# Altium PCB indikator.PcbDoc
Units mm, origin at the board's own origin, x right, y up, seen from the top; angles counter-clockwise.
Board outline 30 x 20 mm, 2 copper layers (Top Layer, Bottom Layer), stack 0.98 mm thick; 14 components, 10 nets, 37 pads, 16 vias.
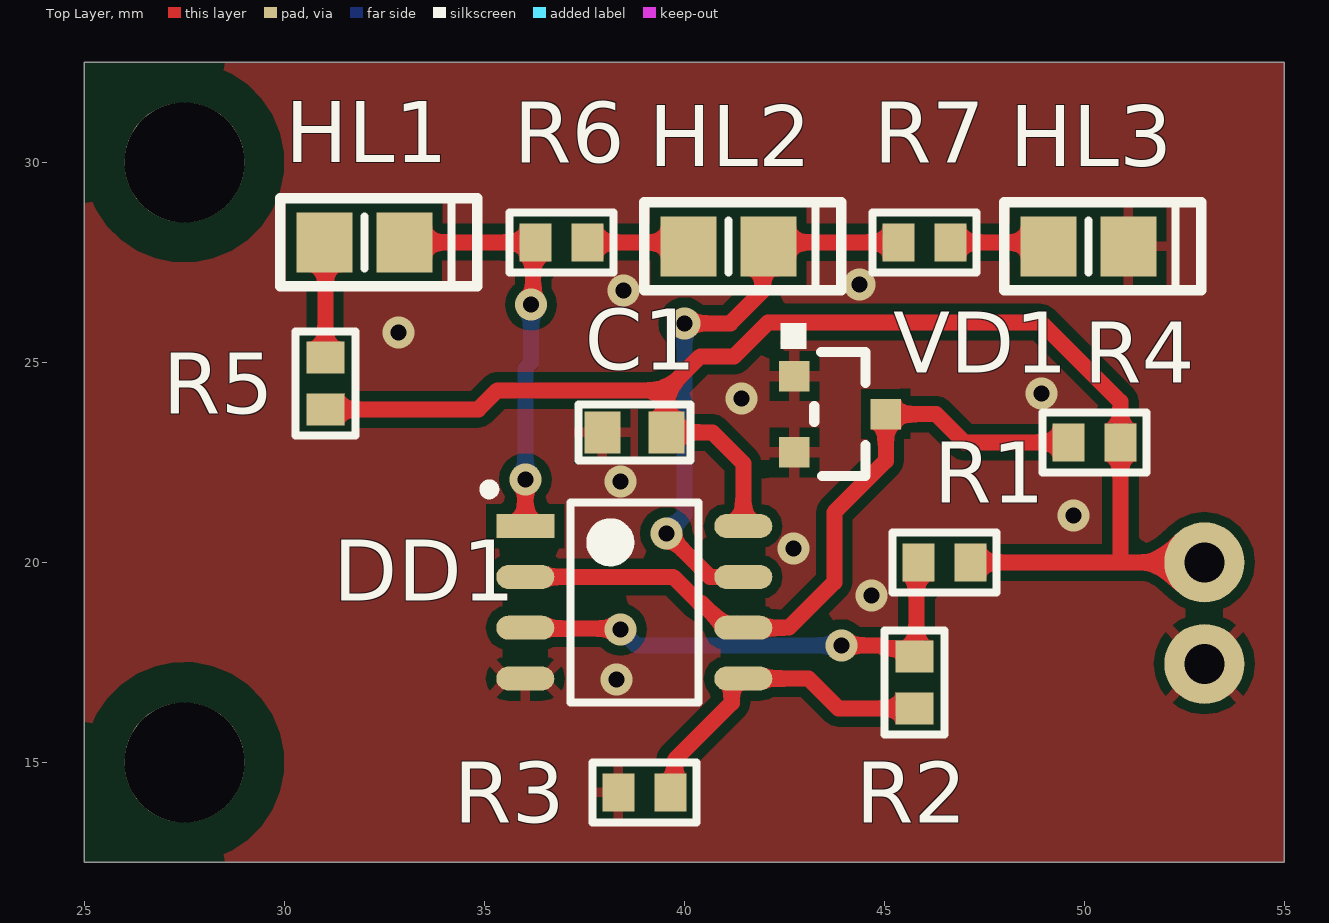
[diagram p0: Top Layer view]
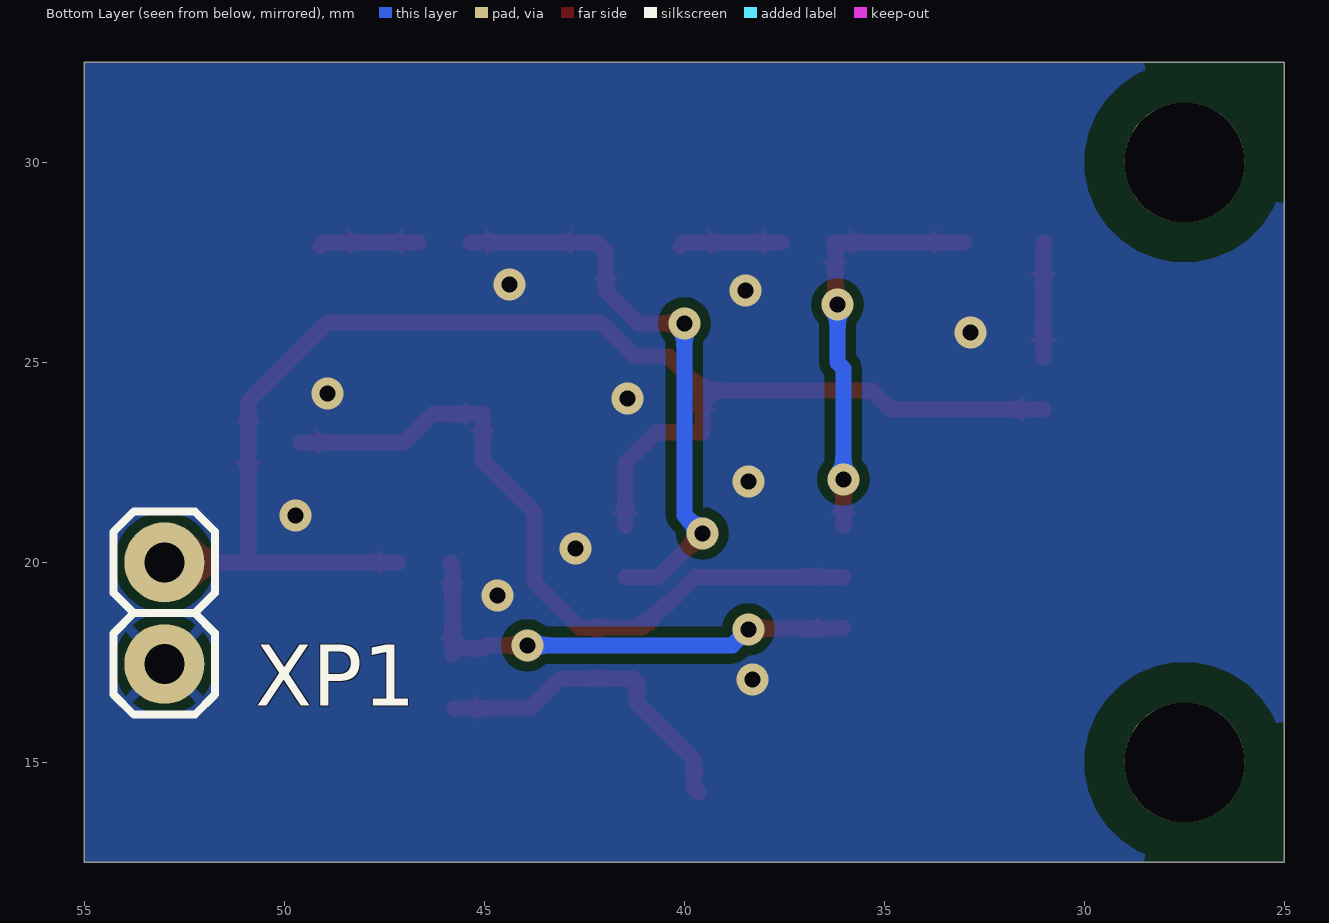
[diagram p1: Bottom Layer view, seen from below]

## Layer stack, top to bottom
Top Solder: solder mask 0.01, Solder Resist, Dk 3.5
Top Layer: signal copper 0.035
Dielectric 1: dielectric 0.91, FR-4, Dk 4.8
Bottom Layer: signal copper 0.035
Bottom Solder: solder mask 0.01, Solder Resist, Dk 3.5

## Board outline
25,12.5 25,32.5 55,32.5 55,12.5

## Design rules (kind name [scope] priority, off if disabled: settings)
Clearance [All] p1: gap=0.25 ignorepadtopadclearanceinfootprint=FALSE
HoleSize [All] p1: absolutevalues=TRUE maxlimit=3 minlimit=0.025 maxpercent=80.000 minpercent=20.000
MinimumSolderMaskSliver [All] p1: minsoldermaskwidth=0.01
PolygonConnect PolygonConnect_1 [HoleSize=0.4] p1: connectstyle=Direct reliefconductorwidth=0.254 reliefentries=4 polygonreliefangle="90 Angle" airgapwidth=0.254
PolygonConnect [All] p2: connectstyle=Relief reliefconductorwidth=0.25 reliefentries=4 polygonreliefangle="45 Angle" conductorbypadedge=TRUE mindistance=0.381 enablemindistance=FALSE airgapwidth=0.25
RoutingVias [All] p1: holewidth=0.4 width=0.8 viastyle="Through Hole" minholewidth=0.4 minwidth=0.8 maxholewidth=0.5 maxwidth=1
SilkToSilkClearance [All] p1: silktosilkclearance=0.01
SilkToSolderMaskClearance [IsPad] p1: minsilkscreentomaskgap=0.01 clearancetoexposedcopper=TRUE
SolderMaskExpansion [All] p1: expansion=0.102 istentingtop=FALSE
SupplyNets "Schematic Supply Nets_1" [InNet('V_BAT')] p1: voltage=0.000
SupplyNets "Schematic Supply Nets" [InNet('GND')] p2: voltage=0.000
Width [All] p1: maxlimit=0.4 minlimit=0.2 preferedwidth=0.25
26 further rules are at their usual default settings.

## Components (designator, comment, footprint, x,y, rotation, side; value= is the part's Value field where it differs from the comment)
C1 "Capacitor" 0603C 38.75,23.25 r0 top value="0,1 мк"
DD1 "LM393" SOIC-8 38.75,19 r0 top
HL1 "LED" 0805D 31.9,28.1 r0 top
HL2 "LED" 0805D 41,28 r0 top
HL3 "LED" 0805D 50,28 r0 top
R1 "Resistor" 0603R 46.5,20 r0 top value="30 к"
R2 "Resistor" 0603R 45.75,17 r90 top value="5,6 к"
R3 "Resistor" 0603R 39,14.25 r0 top value="43 к"
R4 "Resistor" 0603R 50.25,23 r0 top value="5,6 к"
R5 "Resistor" 0603R 31.025,24.475 r270 top value="10 к"
R6 "Resistor" 0603R 36.925,28 r180 top value="10 к"
R7 "Resistor" 0603R 46,28 r180 top value="10 к"
VD1 "BZX84-B11" SOT23-3 42.75,24.655 r0 top value="11 В"
XP1 "PLS-2" PLS2 53,20 r180 bottom

## Footprints (in the part's own frame and the unit in brackets; to place one, negate y for a bottom-side part, rotate by r counter-clockwise, add the part's x,y. Pads: shape width x height; smd on the part's side, far side on the other; paste and mask are expansions set on the pad)
0603C [mm] "Chip Resistor, 2-Leads, Body 1,40x0,80mm, IPC Medium Density"
  rect 0.9x1.05 smd: 1(-0.8,0) 2(0.8,0)
  silkscreen extent -1.4,-0.7 1.4,0.7, body extent -0.85,-0.45 0.85,0.45, height 0.9
0603R [mm] "Chip Resistor, 2-Leads, Body 1.60x0.85mm, IPC Medium Density"
  rect 0.8x0.95 smd: 1(-0.65,0) 2(0.65,0)
  silkscreen extent -1.3,-0.75 1.3,0.75, body extent -0.87,-0.47 0.88,0.48, height 0.9
0805D [mm]
  rect 1.4x1.5 smd: 1(-0.9,-0.1) 2(1.1,-0.1)
  silkscreen extent -2,-1.2 2.93,1, body extent -0.97,-0.8 1.17,0.6, height 0.7
PLS2 [mm]
  round 2 hole 1: 1(0,0) 2(0,-2.54)
  silkscreen extent -1.27,-3.81 1.27,1.27, body extent -1.27,-3.81 1.27,1.27, height 8.44
SOIC-8 [mm] "for operational amplifier"
  rect 1.45x0.6 smd: 1(-2.725,1.905)
  oval 1.45x0.6 smd: 2(-2.725,0.635) 3(-2.725,-0.635) 4(-2.725,-1.905) 5(2.725,-1.905) 6(2.725,-0.635) 7(2.725,0.635) 8(2.725,1.905)
  silkscreen extent -3.75,-2.5 1.6,2.95, body extent -3,-2.5 3,2.5, height 1.75
SOT23-3 [mil]
  rect 30x30 smd: 1(0,0) 2(0,-75) 3(90,-37.5)
  silkscreen extent -13,-98 70,52, body extent -4,-97 94,21, height 41

## Part data
C1: library part Capacitor_0,1u_10_50V_X7R_0603C, "Конденсатор", Capacity (nF)=100, Dielectric=X7R, Tolerance=0,1, Voltage (V)=50, Part Number=Capacitor_0,1u_10_50V_X7R_0603C
DD1: "Двойной маломощный компаратор напряжения", Package="SOIC-8 Texas Instruments", Check_prices=https://www.snapeda.com/parts/LM393D/Texas+Instruments/view-part/?ref=eda, MF="Texas Instruments", MP=LM393D, Part Number=LM393, SnapEDA_Link=https://www.snapeda.com/parts/LM393D/Texas+Instruments/view-part/?ref=snap
HL1: "Светодиод", Color=Красный, Part Number=LED
HL2: "Светодиод", Color=Желтый, Part Number=LED
HL3: "Светодиод", Color=Зелёный, Part Number=LED
R1: library part Resistor_30k_1_0603, "Резистор номиналом 30 кОм и точностью 1%", Tolerance=1%, Part Number=Resistor_30k_1_0603
R2 R4: library part Resistor_5.6k_1_0603, "Резистор номиналом 5,6 кОм и точностью 1%", Tolerance=1%, Part Number=Resistor_5.6k_1_0603
R3: library part Resistor_43k_1_0603, "Резистор номиналом 43 кОм и точностью 1%", Tolerance=1%, Part Number=Resistor_43k_1_0603
R5 R6 R7: library part Resistor_10k_1_0603, "Резистор номиналом 10 кОм и точностью 1%", Tolerance=1%, Part Number=Resistor_10k_1_0603
VD1: "Стабилитрон на 11 В, рассеиваемая мощность 0.25 Вт", Current nominal (mA)=5, Power (W)=0.25, Voltage nominal (V)=11, Accuracy=0,02, Part Number=BZX84-B11
XP1: "Гребенка 2 пина", Value1={Value1}, Value2={Value2}, Part Number=PLS-2

## Free pads (board coordinates)
  round 3 hole 3 unplated: 0(27.5,15) 0(27.5,30)

## Via types
v1: diameter 0.8, hole 0.4, Top Layer to Bottom Layer, 16 vias

## Nets (pads, with @x,y where several pads share a name; then routed paths per layer and width w, separated by ;. In a path a pad name is that pad's centre, name@x,y a point inside that pad or via, vN(x,y) a via of type N, cw(c..) or ccw(c..) an arc to the next point about the centre after c; other vN are vias at no path point)
GND: C1.1 DD1.4 HL3.2 R3.1 VD1.1 VD1.2 XP1.2
  other v1: 38.3,17.075 44.675,19.175 42.725,20.35 49.725,21.175 38.4,22.025 41.425,24.1 48.925,24.225 32.85,25.75 38.475,26.8 44.375,26.95
NetDD1_1: DD1.1 HL1.2 R6.2 | length 10.5
  Top Layer w0.4: HL1.2 R6.2 36.221,27.946 36.221,26.496 v1(36.167,26.442) ; DD1.1 v1(36.025,22.075)
  Bottom Layer w0.4: v1(36.025,22.075) 36.025,24.85 36.167,24.992 v1(36.167,26.442)
NetDD1_2: DD1.2 DD1.6 R4.1 VD1.3 | length 18.3
  Top Layer w0.4: DD1.2 39.721,19.635 40.371,18.985 40.43,18.985 41.05,18.365 DD1.6 42.615,18.365 43.75,19.5 43.75,21.25 45.036,22.536 VD1.3 46.298,23.703 47,23 R4.1
NetDD1_3: DD1.3 R1.1 R2.2 | length 12.4
  Top Layer w0.4: DD1.3 36.045,18.345 38.38,18.345 v1(38.4,18.325) ; v1(43.925,17.925) 44.925,17.925 45,17.85 45.65,17.85 45.8,17.7 45.8,19.95 R1.1
  Bottom Layer w0.4: v1(38.4,18.325) 38.8,17.925 v1(43.925,17.925)
NetDD1_5: DD1.5 R2.1 R3.2 | length 8.3
  Top Layer w0.4: R3.2 39.762,14.362 39.762,15.062 41.186,16.486 41.186,17.003 41.278,17.095 43.105,17.095 43.324,16.876 43.85,16.35 R2.1
NetDD1_7: DD1.7 HL2.2 R7.2 | length 14.6
  Top Layer w0.4: v1(39.55,20.725) 40.64,19.635 DD1.7 ; v1(40,25.975) 41.15,25.975 41.959,26.784 41.959,27.759 42.2,28 R7.2
  Bottom Layer w0.4: v1(39.55,20.725) 40,21.175 v1(40,25.975)
NetHL1_1: HL1.1 R5.1 | length 2.9
  Top Layer w0.4: HL1.1 31.025,27.975 R5.1
NetHL2_1: HL2.1 R6.1 | length 2.6
  Top Layer w0.4: R6.1 40,28 HL2.1
NetHL3_1: HL3.1 R7.1 | length 2.5
  Top Layer w0.4: R7.1 49,28 HL3.1
V_BAT: C1.2 DD1.8 R1.2 R4.2 R5.2 XP1.1 | length 36.3
  Top Layer w0.4: R5.2 34.85,23.825 35.325,24.3 39.55,24.3 ; DD1.8 41.475,22.475 40.924,23.026 40.7,23.25 C1.2 39.55,24.3 ; R1.2 50.577,20 ; 50.617,20 50.9,20 XP1.1 ; 50.875,20 50.9,20.025 50.9,24.016 48.916,26 42.094,26 41.244,25.15 40.4,25.15 39.55,24.3

## Polygon pours and split planes (outlines as drawn)
GND on Bottom Layer "GND_L02_P001" (solid, pour order 1): 25,12.5 25,32.5 55,32.5 55,12.5
GND on Top Layer "GND_L01_P000" (solid, pour order 0): 25,12.5 25,32.5 55,32.5 55,12.5

## Other copper
Top Layer:
  pour cut-out: 27.5,17.5 cw(c27.5,15) 30,15 cw(c27.5,15) 27.5,12.5 cw(c27.5,15) 25,15 cw(c27.5,15)
  pour cut-out: 27.5,32.5 cw(c27.5,30) 30,30 cw(c27.5,30) 27.5,27.5 cw(c27.5,30) 25,30 cw(c27.5,30)
Bottom Layer:
  pour cut-out: 27.5,17.5 cw(c27.5,15) 30,15 cw(c27.5,15) 27.5,12.5 cw(c27.5,15) 25,15 cw(c27.5,15)
  pour cut-out: 27.5,32.5 cw(c27.5,30) 30,30 cw(c27.5,30) 27.5,27.5 cw(c27.5,30) 25,30 cw(c27.5,30)

## Silkscreen, mask and mechanical layers (free items; w line width, h text height)
Mechanical 4:
  the board outline again, w0.025